# Altium PCB plp-cd_2a_assm.PcbDoc
Units mm, origin at the board's own origin, x right, y up, seen from the top; angles counter-clockwise.
Board outline 34 x 22 mm, 4 copper layers (Top Layer, Signal Layer 1, Signal Layer 2, Bottom Layer), stack 1.026 mm thick; 38 components, 36 nets, 155 pads, 46 vias.
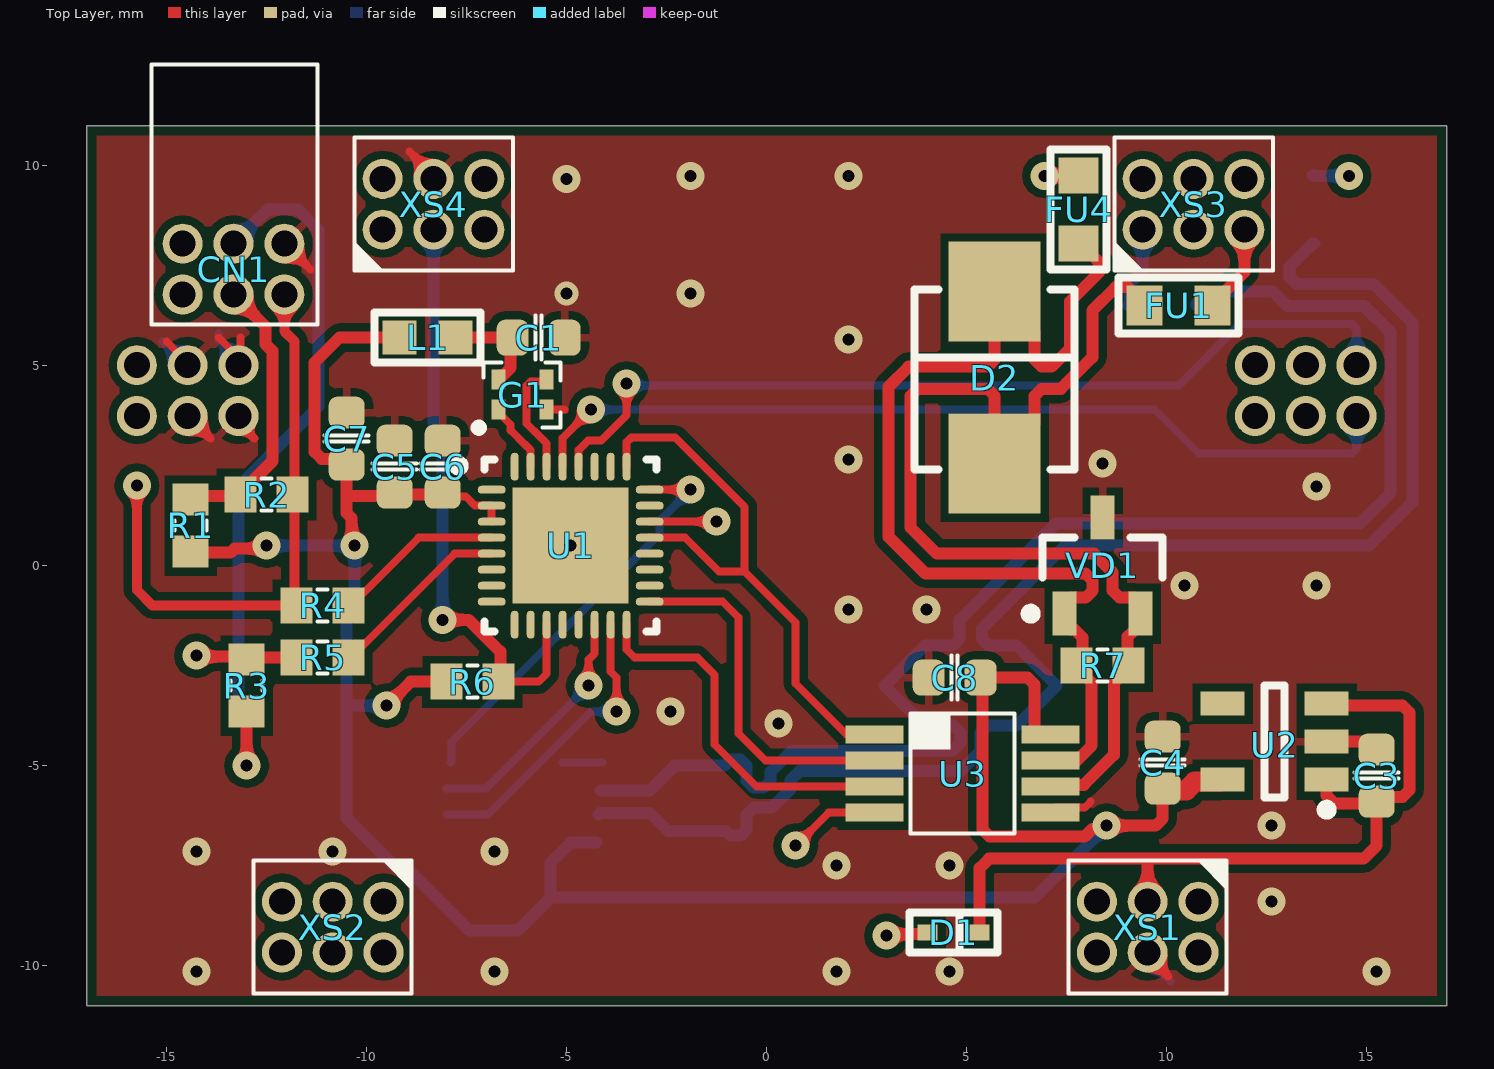
[diagram p0: Top Layer view]
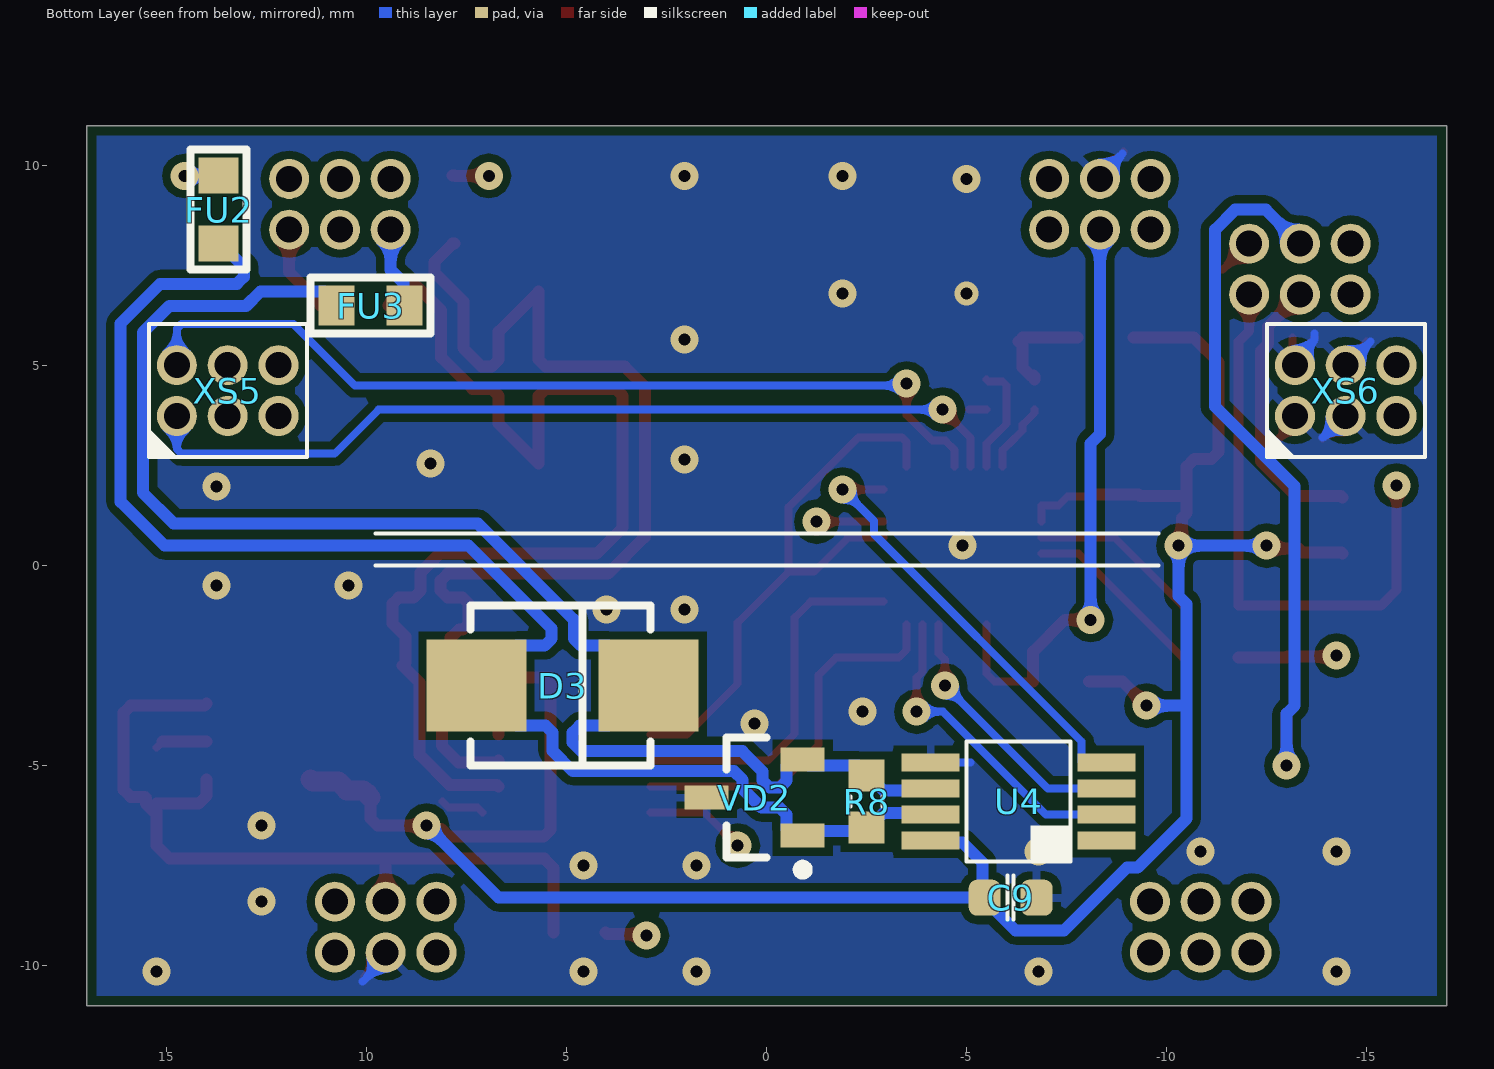
[diagram p1: Bottom Layer view, seen from below]
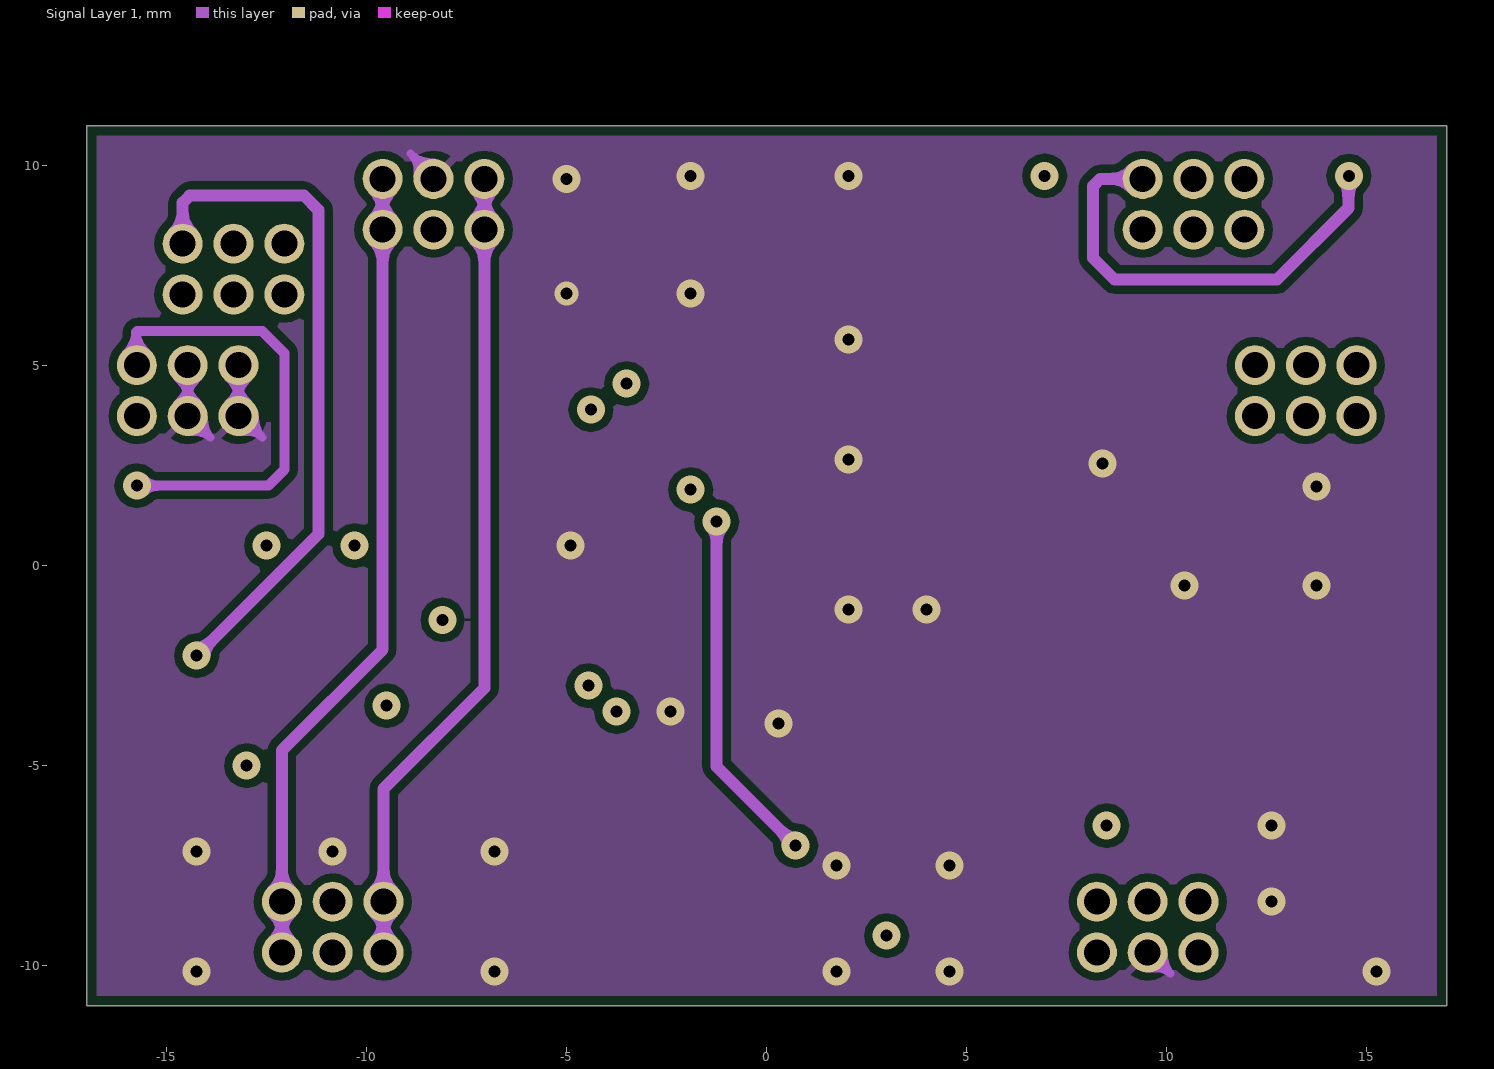
[diagram p2: Signal Layer 1]
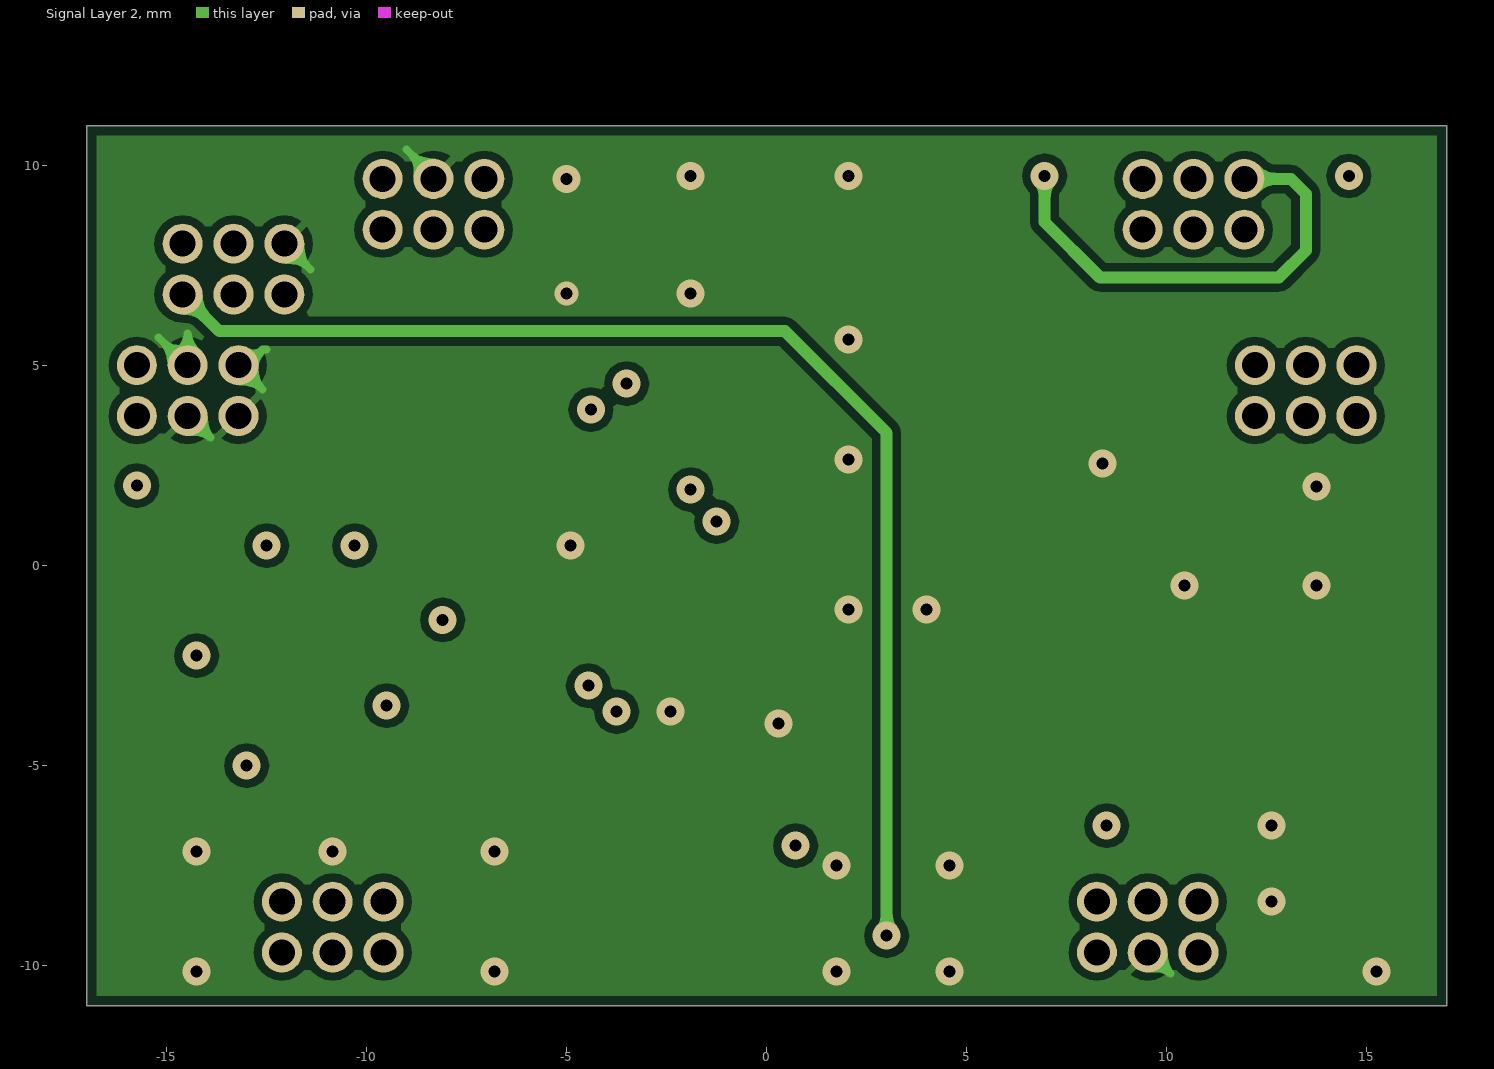
[diagram p3: Signal Layer 2]
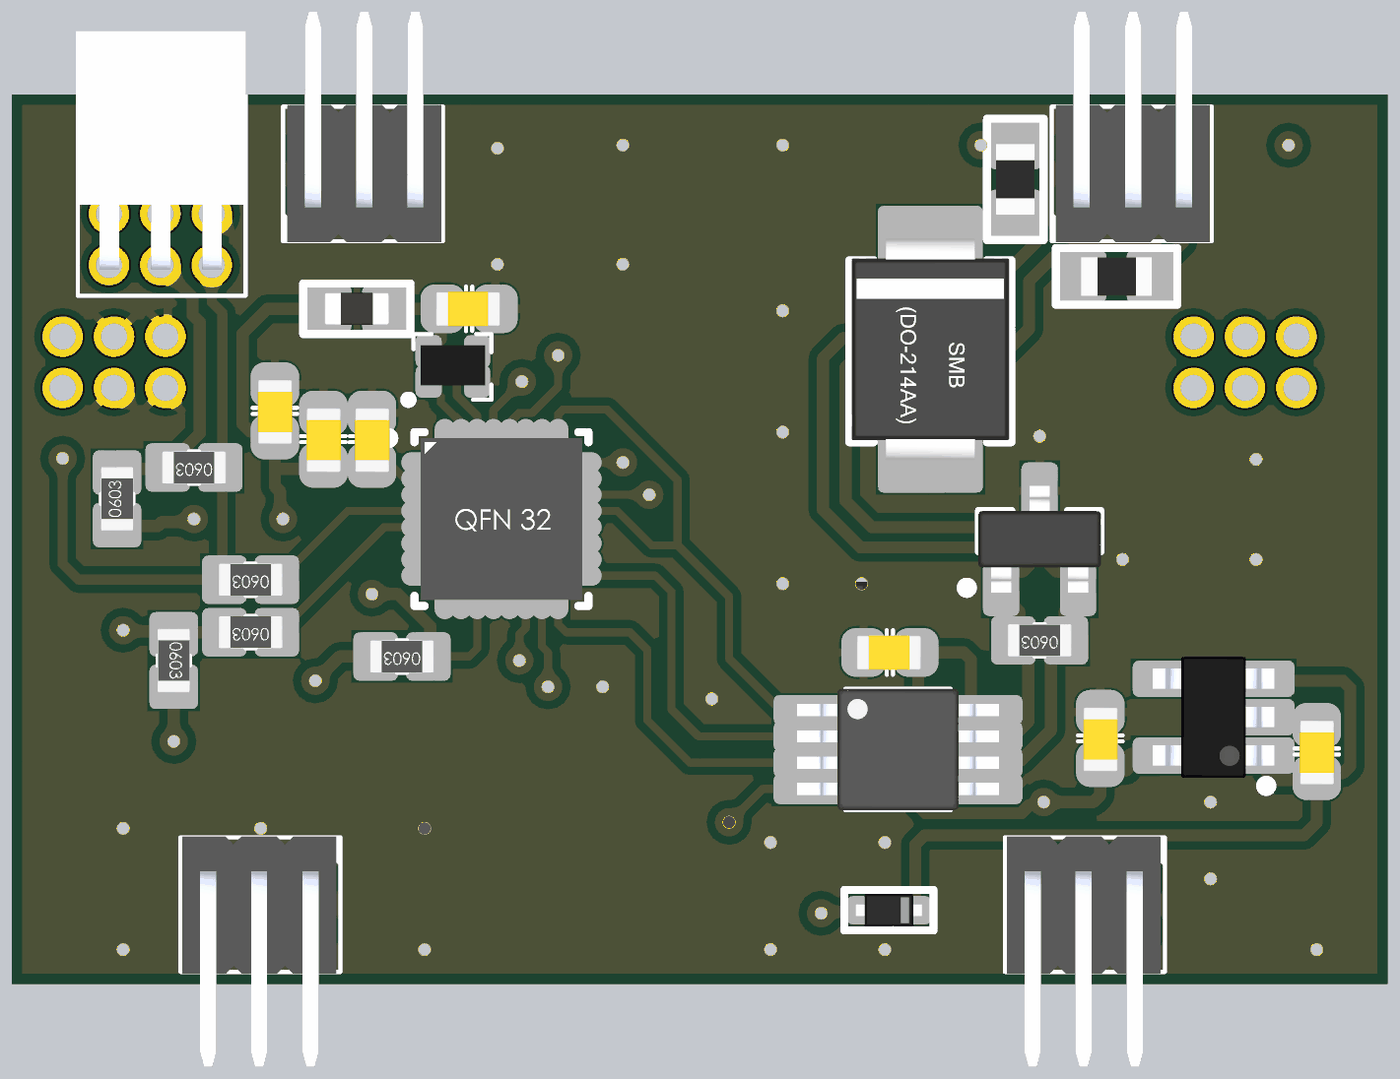
[diagram p4: 3D render of the assembled board from above, using the file's embedded part models]
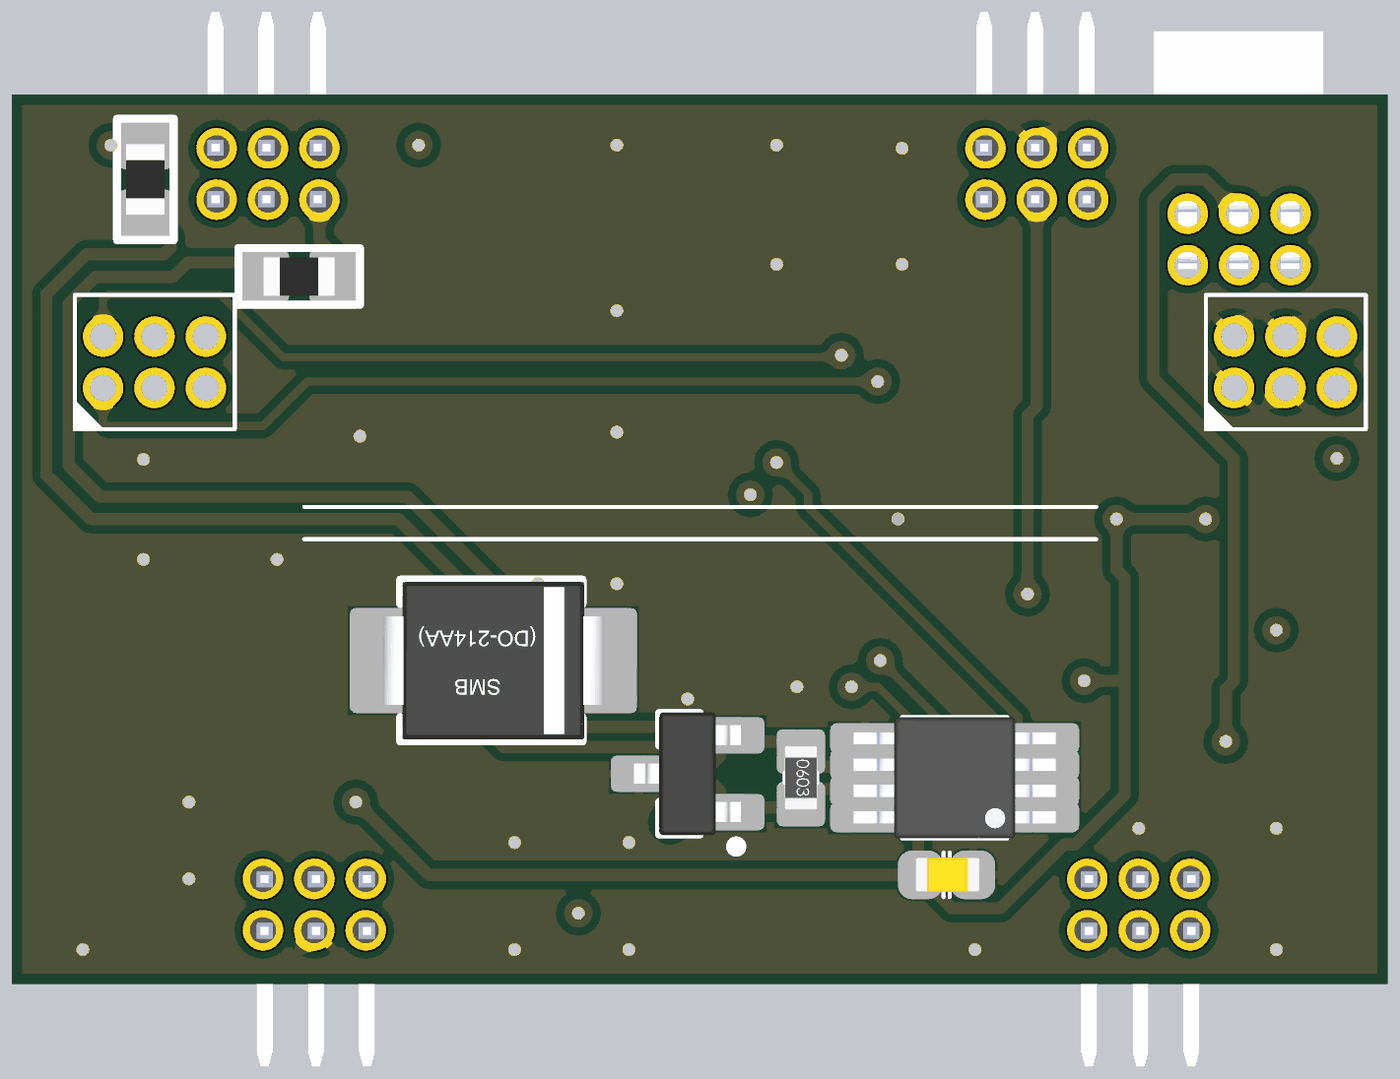
[diagram p5: 3D render of the assembled board from below, using the file's embedded part models]

## Layer stack, top to bottom
Top Solder: solder mask 0.0102, SM-001, Dk 3.5
Top Layer: signal copper 0.035
Dielectric 2: core 0.3, FR4, Dk 4.6
Signal Layer 1: signal copper 0.018
Dielectric 1: prepreg 0.32, FR4 HiTg170, Dk 4.7
Signal Layer 2: signal copper 0.018
Dielectric 3: core 0.3, FR4, Dk 4.6
Bottom Layer: signal copper 0.035
Bottom Solder: solder mask 0.0102, SM-001, Dk 3.5

## Board outline
-17,-9 -17,11 17,11 17,-11 -17,-11

## Design rules (kind name [scope] priority, off if disabled: settings)
AcuteAngle [All] p1: minimum=3.50000000000000E+0001 checktracksonly=FALSE
BoardOutlineClearance "BoardOutlineClearance 1" [All] p1: gap=0.25 ignorepadtopadclearanceinfootprint=FALSE // Milling
BoardOutlineClearance "BoardOutlineClearance 2" [All] p2 off: gap=0.4 ignorepadtopadclearanceinfootprint=FALSE except(0: Arc-SplitContinuation Track-SplitContinuation SMDPad-SplitContinuation THPad-SplitContinuation Via-SplitContinuation Fill-SplitContinuation Poly-SplitContinuation Region-SplitContinuation Text-SplitContinuation) // V-Cut
Clearance "Clearance-1 1 Oz" [All] p1: gap=0.2 ignorepadtopadclearanceinfootprint=TRUE except(0.25: Arc-Hole Track-Hole SMDPad-Hole THPad-Hole Via-Hole Fill-Hole Poly-Hole Region-Hole Text-Hole) // Standart
Clearance "Clearance-1 1/2 Oz" [All] p2 off: gap=0.125 ignorepadtopadclearanceinfootprint=FALSE except(0.2: Arc-Fill Arc-Poly Track-Fill Track-Poly SMDPad-SMDPad SMDPad-Fill SMDPad-Poly THPad-Fill THPad-Poly Via-Fill Via-Poly Fill-Fill Fill-Poly Poly-Poly Poly-Region Poly-Text; 0.25: Arc-Hole Track-Hole SMDPad-Hole THPad-Hole Via-Hole Fill-Hole Poly-Hole Region-Hole Text-Hole) // Standart
Clearance "Clearance-2 1/2 Oz" [All] p3 off: gap=0.1 ignorepadtopadclearanceinfootprint=FALSE except(0.15: Arc-Fill Arc-Poly Track-Fill Track-Poly SMDPad-SMDPad SMDPad-Fill SMDPad-Poly THPad-Fill THPad-Poly Via-Fill Via-Poly Fill-Fill Fill-Poly Poly-Poly Poly-Region Poly-Text; 0.25: Arc-Hole Track-Hole SMDPad-Hole THPad-Hole Via-Hole Fill-Hole Poly-Hole Region-Hole Text-Hole) // Advance
Clearance "Clearance 2 Oz" [All] p4 off: gap=0.3 ignorepadtopadclearanceinfootprint=FALSE except(0.25: Arc-Hole Track-Hole SMDPad-Hole THPad-Hole Via-Hole Fill-Hole Poly-Hole Region-Hole Text-Hole)
Clearance "Clearance-2 1 Oz" [All] p5 off: gap=0.15 ignorepadtopadclearanceinfootprint=FALSE except(0.2: Arc-Fill Arc-Poly Track-Fill Track-Poly SMDPad-Fill SMDPad-Poly THPad-Fill THPad-Poly Via-Fill Via-Poly Fill-Fill Fill-Poly Poly-Poly; 0.25: Arc-Hole Track-Hole SMDPad-Hole THPad-Hole Via-Hole Fill-Hole Poly-Hole Region-Hole Text-Hole) // Advance
Clearance "Clearance 3 Oz" [All] p6 off: gap=0.35 ignorepadtopadclearanceinfootprint=FALSE except(0.25: Arc-Hole Track-Hole SMDPad-Hole THPad-Hole Via-Hole Fill-Hole Poly-Hole Region-Hole Text-Hole)
DiffPairsRouting "DiffPairsRouting 1 Oz" [All] p1: maxlimit=0.254 minlimit=0.2 mostfreqgap=0.254 toplayer_minwidth=0.2 toplayer_maxwidth=0.381 toplayer_prefwidth=0.381 midlayer1_minwidth=0.2 midlayer1_maxwidth=0.381 midlayer1_prefwidth=0.381 midlayer2_minwidth=0.2 midlayer2_maxwidth=0.381 midlayer2_prefwidth=0.381 bottomlayer_minwidth=0.2 bottomlayer_maxwidth=0.381 bottomlayer_prefwidth=0.381 maxuncoupledlength=12.7
DiffPairsRouting "DiffPairsRouting 1/2 Oz" [All] p2 off: maxlimit=0.254 minlimit=0.1 mostfreqgap=0.254 toplayer_minwidth=0.1 toplayer_maxwidth=0.381 toplayer_prefwidth=0.381 midlayer1_minwidth=0.1 midlayer1_maxwidth=0.381 midlayer1_prefwidth=0.381 midlayer2_minwidth=0.1 midlayer2_maxwidth=0.381 midlayer2_prefwidth=0.381 bottomlayer_minwidth=0.1 bottomlayer_maxwidth=0.381 bottomlayer_prefwidth=0.381 maxuncoupledlength=12.7
HoleSize "Minimum HoleSize" [IsPad] p1: absolutevalues=TRUE maxlimit=5.9 minlimit=0.6 maxpercent=80.000 minpercent=20.000
HoleSize "Minimum HoleSize VIA 1" [IsVia] p2: absolutevalues=TRUE maxlimit=5.9 minlimit=0.3 maxpercent=80.000 minpercent=20.000 // Standart
HoleSize "Minimum HoleSize VIA 2" [IsVia] p3 off: absolutevalues=TRUE maxlimit=5.9 minlimit=0.2 maxpercent=80.000 minpercent=20.000 // Advance
HoleToHoleClearance Hole2HoleClearance [All] p1: gap=0.25 allowstackedmicrovias=FALSE
MinimumAnnularRing "Minimum AR VIA Standart" [IsVia] p1: minimumring=0.15
MinimumAnnularRing "Minimum AR PAD Standart" [IsPAD] p2: minimumring=0.2
MinimumAnnularRing "Minimum AR VIA Advance" [IsVia] p3: minimumring=0.1
MinimumAnnularRing "Minimum AR PAD Advance" [IsPAD] p4: minimumring=0.15
MinimumSolderMaskSliver "SolderMask Bridge Standart" [All] p1: minsoldermaskwidth=0.15 // All Masks
MinimumSolderMaskSliver "SolderMask Bridge Advance" [All] p2 off: minsoldermaskwidth=0.1 // Mask LDI
PasteMaskExpansion [All] p1: expansion=0.15
PlaneClearance "PlaneClearance 3 Oz" [All] p1 off: clearance=0.35
PlaneClearance "PlaneClearance 2 Oz" [All] p2 off: clearance=0.3
PlaneClearance "PlaneClearance 1 Oz" [All] p3: clearance=0.2
PlaneClearance "PlaneClearance-1 1/2 Oz" [All] p4 off: clearance=0.2 // Standart
PlaneClearance "PlaneClearance-2 1/2 Oz" [All] p5 off: clearance=0.15 // Advance
PlaneConnect "TermalConnect 3 Oz" [All] p1 off: planeconnectstyle=Relief reliefexpansion=0.2 reliefentries=4 reliefconductorwidth=0.35 reliefairgap=0.35 // Standart
PlaneConnect "TermalConnect 2 Oz" [All] p2 off: planeconnectstyle=Relief reliefexpansion=0.2 reliefentries=4 reliefconductorwidth=0.3 reliefairgap=0.3 // Standart
PlaneConnect "TermalConnect-1 1 Oz" [All] p3: planeconnectstyle=Relief reliefexpansion=0.2 reliefentries=2 reliefconductorwidth=0.2 reliefairgap=0.2 // Standart
PlaneConnect "TermalConnect-2 1 Oz" [All] p4 off: pad.planeconnectstyle=Relief pad.reliefexpansion=0.15 pad.reliefentries=4 pad.reliefconductorwidth=0.2 pad.reliefairgap=0.2 via.planeconnectstyle=Direct via.reliefexpansion=0.15 via.reliefentries=4 via.reliefconductorwidth=0.15 via.reliefairgap=0.15 // Advance
PlaneConnect "TermalConnect-1 1/2 Oz" [All] p5 off: planeconnectstyle=Relief reliefexpansion=0.2 reliefentries=4 reliefconductorwidth=0.2 reliefairgap=0.2 // Standart
PlaneConnect "TermalConnect-2 1/2 Oz" [All] p6 off: pad.planeconnectstyle=Relief pad.reliefexpansion=0.15 pad.reliefentries=4 pad.reliefconductorwidth=0.15 pad.reliefairgap=0.15 via.planeconnectstyle=Direct via.reliefexpansion=0.15 via.reliefentries=4 via.reliefconductorwidth=0.15 via.reliefairgap=0.15 // Advance
PolygonConnect "PolygonConnect 3 Oz" [All] p1 off: thpad.connectstyle=Relief thpad.reliefconductorwidth=0.35 thpad.reliefentries=4 thpad.polygonreliefangle="90 Angle" thpad.airgapwidth=0.35 smdpad.connectstyle=Relief smdpad.reliefconductorwidth=0.35 smdpad.reliefentries=4 smdpad.polygonreliefangle="90 Angle" smdpad.airgapwidth=0.35 via.connectstyle=Direct via.reliefconductorwidth=0.254 via.reliefentries=4 via.polygonreliefangle="90 Angle" via.airgapwidth=0.254
PolygonConnect "PolygonConnect 2 Oz" [All] p2 off: thpad.connectstyle=Relief thpad.reliefconductorwidth=0.3 thpad.reliefentries=4 thpad.polygonreliefangle="90 Angle" thpad.airgapwidth=0.3 smdpad.connectstyle=Relief smdpad.reliefconductorwidth=0.3 smdpad.reliefentries=4 smdpad.polygonreliefangle="90 Angle" smdpad.airgapwidth=0.3 via.connectstyle=Direct via.reliefconductorwidth=0.254 via.reliefentries=4 via.polygonreliefangle="90 Angle" via.airgapwidth=0.254
PolygonConnect "PolygonConnect-1 1 Oz" [All] p3: thpad.connectstyle=Relief thpad.reliefconductorwidth=0.2 thpad.reliefentries=2 thpad.polygonreliefangle="135 Angle" thpad.airgapwidth=0.2 smdpad.connectstyle=Relief smdpad.reliefconductorwidth=0.2 smdpad.reliefentries=4 smdpad.polygonreliefangle="90 Angle" smdpad.airgapwidth=0.2 via.connectstyle=Direct via.reliefconductorwidth=0.254 via.reliefentries=4 via.polygonreliefangle="90 Angle" via.airgapwidth=0.254 // Standart
PolygonConnect "PolygonConnect-2 1 Oz" [All] p4 off: thpad.connectstyle=Relief thpad.reliefconductorwidth=0.15 thpad.reliefentries=4 thpad.polygonreliefangle="90 Angle" thpad.airgapwidth=0.15 smdpad.connectstyle=Relief smdpad.reliefconductorwidth=0.15 smdpad.reliefentries=4 smdpad.polygonreliefangle="90 Angle" smdpad.airgapwidth=0.15 via.connectstyle=Direct via.reliefconductorwidth=0.254 via.reliefentries=4 via.polygonreliefangle="90 Angle" via.airgapwidth=0.254 // Advance
PolygonConnect "PolygonConnect-1 1/2 Oz" [All] p5 off: thpad.connectstyle=Relief thpad.reliefconductorwidth=0.15 thpad.reliefentries=4 thpad.polygonreliefangle="90 Angle" thpad.airgapwidth=0.2 smdpad.connectstyle=Relief smdpad.reliefconductorwidth=0.2 smdpad.reliefentries=4 smdpad.polygonreliefangle="90 Angle" smdpad.airgapwidth=0.2 via.connectstyle=Direct via.reliefconductorwidth=0.254 via.reliefentries=4 via.polygonreliefangle="90 Angle" via.airgapwidth=0.254 // Standart
PolygonConnect "PolygonConnect-2 1/2 Oz" [All] p6 off: thpad.connectstyle=Relief thpad.reliefconductorwidth=0.125 thpad.reliefentries=4 thpad.polygonreliefangle="90 Angle" thpad.airgapwidth=0.15 smdpad.connectstyle=Relief smdpad.reliefconductorwidth=0.125 smdpad.reliefentries=4 smdpad.polygonreliefangle="90 Angle" smdpad.airgapwidth=0.15 via.connectstyle=Direct via.reliefconductorwidth=0.254 via.reliefentries=4 via.polygonreliefangle="90 Angle" via.airgapwidth=0.254 // Advance
RoutingCorners [All] p1 off: cornerstyle=45-Degree minsetback=2.54 maxsetback=2.54
RoutingVias [All] p1: holewidth=0.3 width=0.7 viastyle="Through Hole" minholewidth=0.2 minwidth=0.4 maxholewidth=5.9 maxwidth=6.4
ShortCircuit [All] p1: allowed=TRUE
SilkToSilkClearance Silk2SilkClearance [All] p1: silktosilkclearance=0.15
SilkToSolderMaskClearance Silk2SolderMaskClearance [All] p1: minsilkscreentomaskgap=0.15 clearancetoexposedcopper=FALSE
SolderMaskExpansion SolderMaskExpansion-1 [All] p1: expansion=0.05 istentingtop=FALSE // Standart
SolderMaskExpansion "SolderMaskExpansion LDI" [All] p2: expansion=0.025 istentingtop=FALSE // Advance
UnRoutedNet [All] p1: checkbadconnections=TRUE
Width "Width 1 Oz" [All] p1: maxlimit=10 minlimit=0.15 preferedwidth=0.2 checkconnectedcopper=TRUE
Width "Width 3 Oz" [All] p2 off: maxlimit=10 minlimit=0.35 preferedwidth=0.4 checkconnectedcopper=TRUE
Width "Width 2 Oz" [All] p3 off: maxlimit=10 minlimit=0.3 preferedwidth=0.35 minimp=50.000000 maximp=50.000000 favimp=50.000000 checkconnectedcopper=TRUE
Width "Width 1/2 Oz" [All] p4 off: maxlimit=10 minlimit=0.1 preferedwidth=0.125 checkconnectedcopper=TRUE
18 further rules are at their usual default settings.

## Classes and differential pairs
differential pair SSI_OUT: +SSI_OUT_P -SSI_OUT_N
differential pair 485/SSI: +485/SSI_P -485/SSI_N

## Components (designator, comment, footprint, x,y, rotation, side; value= is the part's Value field where it differs from the comment)
C1 "Ceramic capacitor, 0.1μF, X7R, ±10%, 16V, 0603, -55...+125°C" "CAP: 0603" -5.7,5.7 r180 top value=0.1μF
C3 "Ceramic capacitor, 1μF, X7R, ±10%, 16V, 0603, -55...+125°C" "CAP: 0603" 15.25,-5.25 r270 top value=1μF
C4 "Ceramic capacitor, 1μF, X7R, ±10%, 16V, 0603, -55...+125°C" "CAP: 0603" 9.9,-4.925 r270 top value=1μF
C5 "Ceramic capacitor, 4.7μF, X7R, ±10%, 16V, 0603, -55...+125°C" "CAP: 0603" -9.3,2.475 r270 top value=4.7μF
C6 "Ceramic capacitor, 0.1μF, X7R, ±10%, 16V, 0603, -55...+125°C" "CAP: 0603" -8.1,2.475 r270 top value=0.1μF
C7 "Ceramic capacitor, 4.7μF, X7R, ±10%, 16V, 0603, -55...+125°C" "CAP: 0603" -10.5,3.175 r270 top value=4.7μF
C8 "Ceramic capacitor, 0.1μF, X7R, ±10%, 16V, 0603, -55...+125°C" "CAP: 0603" 4.7,-2.8 r180 top value=0.1μF
C9 "Ceramic capacitor, 0.1μF, X7R, ±10%, 16V, 0603, -55...+125°C" "CAP: 0603" -6.1,-8.3 r180 bottom value=0.1μF
CN1 "PBD 1.27-6R" "CON: PLLD-6R(1.27)" -14.6,6.775 r0 top locked
D1 "Schottky diode, 80V, 500mA, 1V, 15pF, SOD-123, -55...+150°C" "DIODE: SOD523" 4.025,-9.175 r0 top
D2 "SMBJ10CA-TR" "DIODE: SMB" 5.7,4.7 r90 top
D3 "SMBJ10CA-TR" "DIODE: SMB" 5.1,-3 r180 bottom
FU1 "0zcm0002ff2g" "FUSE: 0603" 10.3,6.5 r180 top
FU2 "0zcm0002ff2g" "FUSE: 0603" 13.7,8.9 r90 bottom
FU3 "0zcm0002ff2g" "FUSE: 0603" 9.9,6.5 r180 bottom
FU4 "0zcm0002ff2g" "FUSE: 0603" 7.8,8.9 r270 top
G1 "AMPMGFB-48.0000T" AMPMGFB(1.6x1.2) -6.7,3.9 r0 top
L1 "BLM18AG102SN1D" "IND: 0603" -8.475,5.7 r0 top
R1 "Resistor film, 10K, ±5%, 0603, 0.1W, -55...+125°C" "RES: 0603" -14.4,1 r90 top value=10K
R2 "Resistor film, 1K, ±5%, 0603, 0.1W, -55...+125°C" "RES: 0603" -12.5,1.775 r180 top value=1K
R3 "Resistor film, 1K, ±5%, 0603, 0.1W, -55...+125°C" "RES: 0603" -13,-3 r270 top value=1K
R4 "Resistor film, 100, ±5%, 0603, 0.1W, -55...+125°C" "RES: 0603" -11.1,-1 r180 top value=100
R5 "Resistor film, 100, ±5%, 0603, 0.1W, -55...+125°C" "RES: 0603" -11.1,-2.3 r180 top value=100
R6 "Resistor film, 10K, ±5%, 0603, 0.1W, -55...+125°C" "RES: 0603" -7.359,-2.9 r180 top value=10K
R7 "Resistor film, 120, ±5%, 0603, 0.1W, -55...+125°C" "RES: 0603" 8.4,-2.5 r180 top value=120
R8 "Resistor film, 120, ±5%, 0603, 0.1W, -55...+125°C" "RES: 0603" -2.5,-5.9 r270 bottom value=120
U1 "EFM8BB31F64G-A-QFN32" 32-QFN(4x4) -4.9,0.5 r0 top
U2 "LP5907MFX-3.3" SOT23-5 12.7,-4.4 r180 top
U3 "SN65HVD72DGK" VSSOP-8 4.9,-5.2 r0 top
U4 "SN65HVD72DGK" VSSOP-8 -6.3,-5.9 r0 bottom
VD1 "SM712" SOT23 8.4,0 r90 top
VD2 "SM712" SOT23 0.3,-5.8 r0 bottom
XS1 "2199R05-06G-301523" "CON: PLL-6(2x3R1.27male)" 10.795,-8.4 r180 top locked
XS2 "2199R05-06G-301523" "CON: PLL-6(2x3R1.27male)" -9.58,-8.4 r180 top locked
XS3 "2199R05-06G-301523" "CON: PLL-6(2x3R1.27male)" 9.4,8.4 r0 top locked
XS4 "2199R05-06G-301523" "CON: PLL-6(2x3R1.27male)" -9.6,8.4 r0 top locked
XS5 "2199R05-06G-301523" "CON: PLL-6(2x3R1.27female)" 15.5,2.7 r180 bottom locked
XS6 "2199R05-06G-301523" "CON: PLL-6(2x3R1.27female)" -12.452,2.7 r180 bottom locked

## Footprints (in the part's own frame and the unit in brackets; to place one, negate y for a bottom-side part, rotate by r counter-clockwise, add the part's x,y. Pads: shape width x height; smd on the part's side, far side on the other; paste and mask are expansions set on the pad)
32-QFN(4x4) [mm] "QFN, 32-Leads, Body 4,00x4,00mm, Pitch 0,40mm, Thermal Pad 2,90x2,90mm, IPC Medium Density"
  rect 2.9x2.9 smd: 0(0,0)
  oval 0.7x0.2 smd: 1(-1.975,1.4) 2(-1.975,1) 3(-1.975,0.6) 4(-1.975,0.2) 5(-1.975,-0.2) 6(-1.975,-0.6) 7(-1.975,-1) 8(-1.975,-1.4) 17(1.975,-1.4) 18(1.975,-1) 19(1.975,-0.6) 20(1.975,-0.2) 21(1.975,0.2) 22(1.975,0.6) 23(1.975,1) 24(1.975,1.4)
  oval 0.2x0.7 smd: 9(-1.4,-1.975) 10(-1,-1.975) 11(-0.6,-1.975) 12(-0.2,-1.975) 13(0.2,-1.975) 14(0.6,-1.975) 15(1,-1.975) 16(1.4,-1.975) 25(1.4,1.975) 26(1,1.975) 27(0.6,1.975) 28(0.2,1.975) 29(-0.2,1.975) 30(-0.6,1.975) 31(-1,1.975) 32(-1.4,1.975)
  silkscreen extent -2.92,-2.15 2.15,2.15, body extent -2,-2 2,2, height 0.57
AMPMGFB(1.6x1.2) [mm]
  rect 0.35x0.5 smd: 1(0,0) 2(1.2,0) 3(1.2,0.75) 4(0,0.75)
  silkscreen extent -0.57,-0.8 1.55,1.17, body extent -0.2,-0.1 1.4,0.9, height 0.5
"CAP: 0603" [mm]
  rrect50% 0.8x0.9 smd: 1(-0.65,0) 2(0.65,0)
  silkscreen extent -0.08,-0.55 0.08,0.55, body extent -0.78,-0.43 0.83,0.44, height 0.8
"CON: PLL-6(2x3R1.27female)" [mm]
  round 1 hole 0.65: 1(0.754,1.042) 2(0.754,2.312) 3(2.024,1.042) 4(2.024,2.312) 5(3.294,1.042) 6(3.294,2.312)
  silkscreen extent 0.05,0.02 4.01,3.34
"CON: PLL-6(2x3R1.27male)" [mm]
  round 1 hole 0.65: 1(0,0) 2(0,1.27) 3(1.27,0) 4(1.27,1.27) 5(2.54,0) 6(2.54,1.27)
  silkscreen extent -0.7,-1.02 3.25,2.3, body extent -0.6,-1.05 3.21,4.65, height 4.39
"CON: PLLD-6R(1.27)" [mm]
  round 1 hole 0.65: 1(0,0.005) 2(0,1.275) 3(1.27,0.005) 4(1.27,1.275) 5(2.54,0.005) 6(2.54,1.275)
  silkscreen extent -1.5,-0.75 3.37,5.75, body extent -0.82,-0.1 3.38,5.8, height 3
"DIODE: SMB" [mm]
  rect 2.5x2.3 smd: 1(-2.15,0) 2(2.15,0)
  silkscreen extent -2.3,-2 2.2,2, body extent -2.75,-1.95 2.75,1.95, height 2.45
"DIODE: SOD523" [mm]
  rect 0.5x0.4 smd: 1(0,0) 2(1.3,0)
  silkscreen extent -0.45,-0.5 1.75,0.5, body extent -0.17,-0.4 1.48,0.4, height 0.65
"FUSE: 0603" [mm]
  rect 0.9x1 smd: 1(-0.85,0) 2(0.85,0)
  Top Layer pour cut-out: -0.6,0.5 -0.4,0.7 0.4,0.7 0.6,0.5 0.6,-0.5 0.4,-0.7 -0.4,-0.7 -0.6,-0.5
  silkscreen extent -1.5,-0.7 1.5,0.7, body extent -0.87,-0.47 0.88,0.48, height 0.54
"IND: 0603" [mm]
  rect 0.85x0.85 smd: 1(-0.7,0) 2(0.7,0)
  silkscreen extent -1.33,-0.63 1.33,0.63, body extent -0.8,-0.4 0.8,0.4, height 0.8
"RES: 0603" [mm]
  rect 0.8x0.9 smd: 1(-0.65,0) 2(0.65,0)
  silkscreen extent -0.13,-0.4 0.13,0.4, body extent -0.8,-0.4 0.8,0.4, height 0.44
SOT23 [mm]
  rect 1.1x0.6 smd: 1(-1.2,0.95) 2(-1.2,-0.95) 3(1.2,0)
  silkscreen extent -1.32,-1.5 0.7,1.92, body extent -1.32,-1.52 1.32,1.52, height 1.12
SOT23-5 [mm] "pitch 0.95 mm"
  rect 1.1x0.6 smd: 1(-1.3,0.95) 2(-1.3,0) 3(-1.3,-0.95) 4(1.3,-0.95) 5(1.3,0.95)
  round 0.5 on Mech13: ""(-1.1,1.1)
  silkscreen extent -1.43,-1.4 0.25,1.82, body extent -1.5,-1.5 1.5,1.5, height 1.3
VSSOP-8 [mm]
  rect 1.45x0.45 smd: 1(-2.2,0.975) 2(-2.2,0.325) 3(-2.2,-0.325) 4(-2.2,-0.975) 5(2.2,-0.975) 6(2.2,-0.325) 7(2.2,0.325) 8(2.2,0.975)
  silkscreen extent -1.3,-1.5 1.3,1.5, body extent -2.5,-1.5 2.5,1.5, height 1.1

## Part data
C1 C3 C4 C5 C6 C7 C8 C9: library part Ceramic_0603, Manufacturer=Yageo, Package=0603, PartNumber=CC0603KRX7R7BB104, Temperature=-55...+125°C, Tolerance=±10%, TypeCapacitor="Ceramic capacitor", TypeDielectric=X7R, Voltage=16V, HelpURL=https://www.digikey.com/product-detail/en/yageo/CC0603KRX7R7BB104/311-1088-1-ND/302998
  C1 C6 C8 C9: ValueManufacturerPartNumber="Ceramic capacitor, 0.1μF, X7R, ±10%, 16V, 0603, -55...+125°C"
  C3 C4: ValueManufacturerPartNumber="Ceramic capacitor, 1μF, X7R, ±10%, 16V, 0603, -55...+125°C"
  C5 C7: ValueManufacturerPartNumber="Ceramic capacitor, 4.7μF, X7R, ±10%, 16V, 0603, -55...+125°C"
D1: library part Schottky_single, Current=500mA, Manufacturer="Diodes Incorporated", Package=SOD-123, PartNumber=BAT54XV2, Temperature=-55...+150°C, Voltage=80V, VoltageDrop=1V, HelpURL=https://www.digikey.com/product-detail/en/diodes-incorporated/MBR0580S1-7/MBR0580S1-7DICT-ND/5080371, RecoveryTime=15pF, TypeDiode="Schottky diode", ValueManufacturerPartNumber="Schottky diode, 80V, 500mA, 1V, 15pF, SOD-123, -55...+150°C"
FU1 FU2 FU3 FU4: library part FUSE:0603
L1: "100MHz 1K"
R1 R2 R3 R4 R5 R6 R7 R8: library part Resistor_0603, Manufacturer=Yageo, Package=0603, PartNumber=RC0603JR-07100RL, Power=0.1W, Temperature=-55...+125°C, Tolerance=±5%, TypeResistor="Resistor film", HelpURL=https://www.digikey.com/product-detail/en/yageo/RC0603JR-07100RL/311-100GRCT-ND/729644
  R1 R6: ValueManufacturerPartNumber="Resistor film, 10K, ±5%, 0603, 0.1W, -55...+125°C"
  R2 R3: ValueManufacturerPartNumber="Resistor film, 1K, ±5%, 0603, 0.1W, -55...+125°C"
  R4 R5: ValueManufacturerPartNumber="Resistor film, 100, ±5%, 0603, 0.1W, -55...+125°C"
  R7 R8: ValueManufacturerPartNumber="Resistor film, 120, ±5%, 0603, 0.1W, -55...+125°C"
U1: "8051 MCU Core"
U2: "LDO 250 mA"
U3 U4: "RS-485/422", ComponentLink1Description=Datasheet, ComponentLink1URL=https://www.ti.com/lit/ds/symlink/sn65hvd72.pdf?ts=1607084930164&ref_url=https%253A%252F%252Fwww.ti.com%252Fstore%252Fti%252Fen%252Fp%252Fproduct%252F%253Fp%253DSN65HVD72DRBT
VD1: "EIA RS-485 ±7V ±12V"
VD2: "EIA RS-485 ±7V"
XS1 XS2 XS3 XS4: library part 2199R05-06G-301523Out, "Step 1.27 R"
XS5 XS6: library part 2199R05-06G-301523In, "Step 1.27"

## Via types
v1: diameter 0.7, hole 0.3, Top Layer to Bottom Layer, tented both sides, 43 vias
v2: diameter 0.7, hole 0.3, Top Layer to Bottom Layer, tented bottom, 1 vias
v3: diameter 0.6, hole 0.3, Top Layer to Bottom Layer, tented both sides, 1 vias
v4: diameter 0.7/0.7/0.7/0.7 (per signal layer), hole 0.3, Top Layer to Bottom Layer, tented both sides, 1 vias

## Nets (pads, with @x,y where several pads share a name; then routed paths per layer and width w, separated by ;. In a path a pad name is that pad's centre, name@x,y a point inside that pad or via, vN(x,y) a via of type N, cw(c..) or ccw(c..) an arc to the next point about the centre after c; other vN are vias at no path point)
3.3V: C4.2 C5.2 C6.2 C7.2 C8.1 C9.1 L1.1 R1.1 R6.2 U1.2 U1.3 U2.5 U3.8 U4.8 | length 62.6
  Top Layer w0.2: C6.2@-8.1,1.775 -8.059,1.734 -7.525,1.734 -7.291,1.5 U1.2 U1.3
  Top Layer w0.3: R1.1@-14.4,0.3 -14.375,0.325 -13.4,0.325 -13.3,0.425 -12.575,0.425 v1(-12.5,0.5) ; v1(-10.3,0.5) -10.377,0.577 -10.377,1.19 -10.5,1.313 -10.5,1.737 ; v1(-9.5,-3.5) -8.9,-2.9 R6.2@-8.059,-2.9 ; L1.1 -10.683,5.7 -11.3,5.083 -11.3,2.846 -11.124,2.67 -10.695,2.67 -10.5,2.475 -10.5,1.737 ; C6.2@-8.1,1.775 -9.3,1.775 -9.337,1.737 -10.5,1.737 ; U3.8@6.7,-4.225 6.7,-2.976 6.524,-2.8 5.4,-2.8 5.4,-6.599 5.576,-6.775 7.945,-6.775 8.143,-6.577 8.423,-6.577 v1(8.5,-6.5) 9.724,-6.5 9.9,-6.324 9.9,-5.8 C4.2@9.9,-5.625
  Top Layer w0.5: C4.2@9.9,-5.8 10.076,-5.624 10.5,-5.624 10.5,-5.6 10.7,-5.4 11.35,-5.4 U2.5
  Bottom Layer w0.3: v1(-12.5,0.5) v1(-10.3,0.5) -10.3,-0.759 -10.5,-0.959 -10.5,-3.5 ; v1(-9.5,-3.5) -10.5,-3.5 ; U4.8@-4.25,-6.925 -4.9,-6.925 -5.4,-7.425 C9.1@-5.4,-8.3 ; v1(8.5,-6.5) 6.7,-8.3 C9.1@-5.4,-8.3 ; -10.5,-3.5 -10.5,-6.32 -9.575,-7.245 -9.27,-7.55 -9.005,-7.55 -7.43,-9.125 -6.225,-9.125 C9.1@-5.4,-8.3
5V: C3.2 D1.2 U2.1 U2.3 XS1.3 | length 20.9
  Top Layer w0.3: D1.2 5.325,-7.559 5.559,-7.325 9.521,-7.325 ; XS1.3 9.525,-7.329 9.521,-7.325 ; U2.1 14,-5.75 14.2,-5.95 15.25,-5.95 C3.2@15.25,-6.219 ; U2.3 14.05,-3.5 15.899,-3.5 16.075,-3.676 16.075,-5.604 15.899,-5.78 15.546,-5.78 15.52,-5.806 15.52,-5.949 C3.2@15.25,-6.219 ; 9.521,-7.325 14.925,-7.325 15.25,-7 C3.2@15.25,-6.219
485/SCKA: FU1.1 XS3.5 | length 2.2
  Top Layer w0.3: FU1.1 11.15,6.55 11.94,7.34 XS3.5
485/SCKB: FU4.1 XS3.6 | length 12.6
  Top Layer w0.3: v1(6.949,9.748) 7.798,9.748 FU4.1 FU4.1@7.85,9.75
  Signal Layer 2 w0.3: v1(6.949,9.748) 6.949,8.589 8.333,7.205 12.805,7.205 13.476,7.876 13.476,9.296 13.102,9.67 XS3.6
485/SSI_N: D2.2 FU4.2 R7.2 U3.7 VD1.1 | length 27.1
  Top Layer w0.3: U3.7@6.7,-4.875 6.748,-4.923 7.7,-4.923 8.123,-4.5 8.123,-2.923 7.7,-2.5 7.899,-2.301 7.899,-1.801 7.699,-1.6 7.6,-1.6 7.45,-1.45 7.45,-0.95 7.6,-0.8 7.974,-0.8 8.15,-0.624 8.15,-0.376 7.974,-0.2 3.97,-0.2 3.046,0.724 3.046,4.477 3.546,4.977 5.524,4.977 5.7,5.153 D2.2 6.7,5.85 6.7,5.153 6.876,4.977 7.124,4.977 7.585,5.438 7.585,6.609 8.302,7.326 8.302,7.598 7.85,8.05 FU4.2
485/SSI_P: D2.1 FU1.2 R7.1 U3.6 VD1.2 | length 27.4
  Top Layer w0.3: U3.6@6.7,-5.525 6.748,-5.477 7.929,-5.477 8.677,-4.729 8.677,-2.923 9.1,-2.5 9.024,-2.424 9.024,-1.776 9.2,-1.6 9.35,-1.45 9.35,-0.95 9.2,-0.8 8.826,-0.8 8.65,-0.624 8.65,-0.169 8.181,0.3 4.253,0.3 3.6,0.953 3.6,4.247 3.776,4.423 5.524,4.423 5.7,4.247 D2.1 6.7,3.55 6.7,4.247 6.876,4.423 7.354,4.423 8.139,5.209 8.139,6.379 8.726,6.966 9.034,6.966 9.406,6.594 9.406,6.544 FU1.2
+15: XS1.2
+Uп: XS2.5 XS2.6 XS4.1 XS4.2 | length 20.4
  Signal Layer 1 w0.3: XS2.6 XS2.5 -12.12,-4.62 -9.6,-2.1 XS4.1 XS4.2
-15: XS1.6
-Uп: XS2.1 XS2.2 XS4.5 XS4.6 | length 20.4
  Signal Layer 1 w0.3: XS2.2 XS2.1 -9.58,-5.58 -7.06,-3.06 XS4.5 XS4.6
C2CK: CN1.5 R2.1 R4.2 XS6.6 | length 26.1
  Top Layer w0.25: v1(-15.746,2) -15.746,-0.608 -15.354,-1 -11.8,-1 -11.8,1.775 -11.8,5.602 -12.06,5.862 CN1.5
  Signal Layer 1 w0.25: v1(-15.746,2) -12.46,2 -12.06,2.4 -12.06,5.313 -12.609,5.862 -15.74,5.862 -15.765,5.837 -15.765,5.031 XS6.6
C2D: CN1.2 R3.1 R5.2 | length 19.5
  Top Layer w0.3: v4(-14.25,-2.25) -14.225,-2.275 -13.025,-2.275 -13,-2.3 R5.2@-11.8,-2.3
  Signal Layer 1 w0.3: CN1.2 -14.6,9.074 -14.424,9.25 -11.566,9.25 -11.21,8.894 -11.21,0.79 v4(-14.25,-2.25)
C2Dsns: CN1.4 R3.2 | length 18.3
  Top Layer w0.3: v1(-13,-5) R3.2@-13,-3.7
  Bottom Layer w0.3: CN1.4 -12.48,8.9 -11.708,8.9 -11.21,8.402 -11.21,3.977 -13.2,1.987 -13.2,-3.5 -13,-3.7 v1(-13,-5)
DE1: U1.16 U3.3 | length 9.5
  Top Layer w0.2: U1.16 -3.5,-2.1 -3.3,-2.3 -2.341,-2.3 -1.731,-2.3 -1.3,-2.731 -1.3,-4.475 -0.25,-5.525 U3.3@2.9,-5.525
DE2: U1.14 U4.3 | length 6.2
  Top Layer w0.2: v1(-4.459,-3) -4.459,-2.959 -4.455,-2.955 -4.455,-2.35 -4.3,-2.195 -4.3,-1.769 U1.14
  Bottom Layer w0.2: U4.3@-8,-5.575 -7.034,-5.575 v1(-4.459,-3)
EXTCLK: G1.3 U1.30 | length 2.8
  Top Layer w0.2: U1.30 -5.5,3.056 -5.794,3.35 -5.799,3.35 -6,3.551 -6,4.5 -5.9,4.6 -5.55,4.6 G1.3
EXTOn: G1.1 U1.31 | length 1.7
  Top Layer w0.2: G1.1 -6.7,3.825 -6.4,3.525 -6.4,3.385 -6.06,3.045 ; -6.039,3.03 -5.9,2.891 U1.31
GND: C1.1 C3.1 C4.1 C5.1 C6.1 C7.1 C8.2 C9.2 CN1.6 G1.2 U1.0 U2.2 U3.5 U4.5 VD1.3 VD2.3 XS1.4 XS4.4 XS6.1 XS6.2 XS6.3 XS6.4 | length 27.9
  Top Layer w0.2: -15,5.6 -14.476,5.076 XS6.4 ; XS6.3 -14.467,3.742 -13.9,3.175 ; -13.7,5.7 -13.206,5.206 XS6.2 -13.15,5.068 -13.15,5.7 ; XS6.1 -13.206,3.575 -12.806,3.175 ; CN1.6 -12.05,8.05 -11.4,7.4 ; -8.925,10.35 -8.33,9.755 XS4.4 ; G1.2 -5.062,3.9 -5.055,3.907 ; U3.5 7.225,-6.05 7.95,-6.05 8.1,-5.9 ; XS1.4 9.525,-9.75 10.05,-10.275 ; C3.1@15.1,-4.4 C3.1@15.25,-4.55
  Top Layer w0.3: U2.2 C3.1@15.1,-4.4
  Signal Layer 1 w0.2: XS6.4 XS6.3 -14.442,3.742 -13.9,3.2 ; XS6.2 XS6.1 -13.142,3.742 -12.6,3.2 ; -8.9,10.3 -8.33,9.73 XS4.4 ; XS1.4 9.57,-9.67 10.1,-10.2
  Signal Layer 2 w0.2: -15.2,5.7 -14.512,5.012 XS6.4 -14.476,5.8 ; XS6.3 -14.442,3.742 -13.9,3.2 ; -12.6,4.4 -13.206,5.006 XS6.2 -12.989,5.012 -12.602,5.4 -12.5,5.4 ; CN1.6 -12.05,8.05 -11.4,7.4 ; -9,10.4 -8.33,9.73 XS4.4 ; XS1.4 9.57,-9.67 10.1,-10.2
  Bottom Layer w0.2: -15.1,5.6 -14.512,5.012 XS6.4 ; XS6.3 -14.442,3.742 -13.9,3.2 ; -13.7,5.8 -13.7,5.649 -13.206,5.155 XS6.2 ; -8.9,10.3 -8.33,9.73 XS4.4 ; -5.1,-4.925 U4.5 ; XS1.4 9.525,-9.825 10.1,-10.4
  other v1: -14.25,-10.15 -6.8,-10.15 1.75,-10.15 4.575,-10.15 15.25,-10.15 12.625,-8.4 1.75,-7.5 4.575,-7.5 -14.25,-7.15 -10.85,-7.15 -6.8,-7.15 12.625,-6.5 0.3,-3.95 -2.4,-3.65 2.05,-1.1 4,-1.1 10.45,-0.5 13.75,-0.5 13.75,1.975 8.4,2.55 2.05,2.65 2.05,5.65 -1.9,6.8 -5,9.67 -1.9,9.748 2.05,9.748
  other v2: -4.9,0.5
  other v3: -5,6.8
MOSI_MCU2: U1.23
NetC1_2: C1.2 G1.4 L1.2 | length 2.7
  Top Layer w0.3: L1.2 C1.2@-6.4,5.7 ; G1.4 -6.7,4.725 -6.675,4.75 -6.6,4.75 -6.4,4.95 C1.2@-6.4,5.7 ; C1.2@-6.3,5.6 C1.2@-6.4,5.7
NetCN1_1: CN1.1 D1.1 | length 32.7
  Top Layer w0.3: v1(3,-9.25) 3.037,-9.212 3.988,-9.212 D1.1
  Signal Layer 2 w0.3: CN1.1 -13.682,5.862 0.458,5.862 3,3.32 v1(3,-9.25)
NetR4_1: R4.1 U1.4 | length 4.2
  Top Layer w0.2: R4.1@-10.4,-1 -8.7,0.7 U1.4
NetR5_1: R5.1 U1.5 | length 4.6
  Top Layer w0.2: R5.1@-10.4,-2.3 -7.8,0.3 U1.5
P2.6: R6.1 U1.11 XS4.3 | length 14.8
  Top Layer w0.2: R6.1@-6.659,-2.9 -5.7,-2.9 -5.5,-2.7 U1.11
  Top Layer w0.3: v1(-8.1,-1.355) -7.454,-1.355 -6.659,-2.15 R6.1@-6.659,-2.9
  Bottom Layer w0.3: XS4.3 -8.33,3.289 -8.1,3.059 v1(-8.1,-1.355)
RE1: U1.17 U3.2 | length 9.2
  Top Layer w0.2: U1.17 -1.1,-0.9 -0.7,-1.3 -0.7,-4.2 -0.025,-4.875 U3.2@2.9,-4.875
RE2: U1.15 U4.2 | length 7.6
  Top Layer w0.2: U1.15 -3.9,-1.934 -3.9,-2.65 -3.75,-2.8 v1(-3.75,-3.65)
  Bottom Layer w0.2: U4.2@-8,-6.225 -6.98,-6.225 -4.405,-3.65 v1(-3.75,-3.65)
RST: CN1.3 R1.2 R2.2 | length 7
  Top Layer w0.3: R1.2@-14.4,1.7 -14.363,1.737 -13.238,1.737 -12.356,2.619 -12.356,5.364 -12.535,5.544 -12.535,5.985 CN1.3
"SSI OUT A": FU3.2 XS3.1 | length 2
  Bottom Layer w0.3: FU3.2 9.086,6.536 9.086,7.08 9.4,7.394 XS3.1
"SSI OUT B": FU2.2 XS3.2 | length 12.4
  Signal Layer 1 w0.3: XS3.2 8.338,9.67 8.162,9.494 8.162,7.688 8.691,7.159 12.759,7.159 14.544,8.944 14.544,9.736 v1(14.553,9.744)
  Bottom Layer w0.3: XS3.2 XS3.2@9.534,9.804 ; FU2.2@13.65,9.75 FU2.2 13.706,9.744 v1(14.553,9.744)
SSI_MISO: U1.24 U4.4 | length 10.3
  Top Layer w0.2: U1.24 v1(-1.9,1.9)
  Bottom Layer w0.2: U4.4@-7.9,-4.925 -7.875,-4.9 -7.875,-4.4 -2.679,0.796 -2.679,1.121 v1(-1.9,1.9)
SSI_OUT_N: D3.1 FU2.1 R8.2 U4.7 VD2.1 | length 37.7
  Bottom Layer w0.3: U4.7@-4.2,-6.225 -4.152,-6.177 -2.923,-6.177 -2.463,-6.637 -1.013,-6.637 VD2.1 -0.65,-6.75 -0.5,-6.6 -0.5,-6.226 -0.324,-6.05 0.131,-6.05 0.6,-5.581 0.6,-5.355 0.819,-5.136 4.845,-5.136 5.35,-4.631 5.35,-4.176 5.526,-4 6.25,-4 D3.1 6.25,-2 5.553,-2 5.377,-1.824 5.377,-1.576 7.453,0.5 15.054,0.5 16.15,1.597 16.15,6.059 15.162,7.047 13.247,7.047 13.071,7.223 13.071,7.471 13.65,8.05 FU2.1
SSI_OUT_P: D3.2 FU3.1 R8.1 U4.6 VD2.2 | length 37.4
  Bottom Layer w0.3: U4.6@-4.152,-5.623 -2.923,-5.623 -2.3,-5 -1.05,-5 VD2.2 -0.65,-4.85 -0.5,-5 -0.5,-5.374 -0.324,-5.55 -0.076,-5.55 0.1,-5.374 0.1,-5.148 0.612,-4.636 4.638,-4.636 4.85,-4.424 4.85,-4.176 4.674,-4 3.95,-4 D3.2 3.95,-2 4.647,-2 4.823,-1.824 4.823,-1.346 7.223,1.054 14.824,1.054 15.596,1.826 15.596,5.829 14.933,6.493 13.017,6.493 12.66,6.85 11.05,6.85 10.75,6.55 FU3.1
SSI_SCK: U1.21 U1.25 U3.1 | length 14.7
  Top Layer w0.2: U1.25 -3.5,3.091 -3.383,3.208 -2.289,3.208 -0.55,1.469 -0.55,-0.15 ; U1.21 -2.037,0.7 -1.187,-0.15 -0.55,-0.15 ; U3.1@2.9,-4.225 2,-4.225 0.725,-2.95 0.725,-1.425 -0.55,-0.15
UART1_TX: U1.22 U3.4 | length 13.1
  Top Layer w0.2: U1.22 v1(-1.25,1.1) ; v1(0.725,-7) 1.55,-6.175 U3.4@2.9,-6.175
  Signal Layer 1 w0.3: v1(-1.25,1.1) -1.25,-5.025 v1(0.725,-7)
UART_IN: U1.28 XS5.2 | length 22.6
  Top Layer w0.2: U1.28 -4.7,2.891 -4.466,3.125 -4.146,3.125 -3.5,3.771 v1(-3.5,4.55)
  Bottom Layer w0.2: v1(-3.5,4.55) -3.45,4.5 10.293,4.5 11.835,6.043 14.629,6.043 14.746,5.926 XS5.2
UART_OUT: U1.29 XS5.1 | length 22.2
  Top Layer w0.2: U1.29 -5.1,3.196 v1(-4.396,3.9)
  Bottom Layer w0.2: v1(-4.396,3.9) 9.7,3.9 10.8,2.8 14.629,2.8 14.746,2.917 XS5.1
pads on no net: U1.1 U1.6 U1.7 U1.8 U1.9 U1.10 U1.12 U1.13 U1.18 U1.19 U1.20 U1.26 U1.27 U1.32 U2. U2.4 U4.1 XS1.1 XS1.5 XS2.3 XS2.4 XS3.3 XS3.4 XS5.3 XS5.4 XS5.5 XS5.6 XS6.5

## Polygon pours and split planes (outlines as drawn)
GND on Signal Layer 1 "NONET_L02_P-001" (solid, pour order 10): -17,11 17,11 17,-11 -17,-11
no net on Signal Layer 1 "NONET_L02_P-001" (solid, pour order 9): -17,11
no net on Signal Layer 1 "NONET_L02_P-001" (solid, pour order 3): -13,1
GND on Signal Layer 2 "NONET_L02_P-001" (solid, pour order 6): -17,11 17,11 17,-11 -17,-11
GND on Bottom Layer "NONET_L02_P-001" (solid, pour order 8): -17,11 17,11 17,-11 -17,-11
GND on Top Layer "NONET_L02_P-001" (solid, pour order 7): -17,11 17,11 17,-11 -17,-11

## Silkscreen, mask and mechanical layers (free items; w line width, h text height)
Bottom Overlay:
  lines w0.1: -9.8,0 9.775,0 ; -9.8,0.8 9.775,0.8
Mechanical 1:
  circle w0.3: c3.2,-4.2 r0.1
  circle w0.3: c-6.7,2.3 r0.1
  circle w0.3: c13.8,-5.3 r0.1
  circle w0.3: c-6.7,3.8 r0.1
  lines w0.15: 3.75,6 7.75,6 ; 5.3,-9.7 5.3,-8.7 ; -16.363,2.758 -16.363,6.058 -12.463,6.058 -12.463,2.758 -16.363,2.758 ; -15.4,6 -11.2,6 -11.2,12.5 -15.4,12.5 -15.4,6 ; -14.9,-0.2 -13.9,-0.2 -13.9,2.2 -14.9,2.2 -14.9,-0.2 ; -13.7,1.3 -11.3,1.3 -11.3,2.3 -13.7,2.3 -13.7,1.3 ; -13.5,-4.1 -12.5,-4.1 -12.5,-1.7 -13.5,-1.7 -13.5,-4.1 ; -12.863,-10.642 -12.863,-7.342 -8.963,-7.342 -8.963,-10.642 -12.863,-10.642 ; -12.3,-2.8 -9.9,-2.8 -9.9,-1.8 -12.3,-1.8 -12.3,-2.8 ; -12.3,-1.5 -12.3,-0.5 -9.9,-0.5 -9.9,-1.5 -12.3,-1.5 ; -11,2 -10,2 -10,4.4 -11,4.4 -11,2 ; -10.3,7.4 -6.4,7.4 -6.4,10.7 -10.3,10.7 -10.3,7.4 ; -9.8,1.4 -8.8,1.4 -8.8,3.8 -9.8,3.8 -9.8,1.4 ; -9.7,5.2 -9.7,6.2 -7.3,6.2 -7.3,5.2 -9.7,5.2 ; -8.6,-3.4 -6.2,-3.4 -6.2,-2.4 -8.6,-2.4 -8.6,-3.4 ; -8.6,1.4 -7.6,1.4 -7.6,3.8 -8.6,3.8 -8.6,1.4 ; -7.1,-1.7 -2.7,-1.7 -2.7,2.7 -7.1,2.7 -7.1,-1.7 ; -7.1,3.4 -5.2,3.4 -5.2,5 -7.1,5 -7.1,3.4 ; -6.9,5.2 -4.5,5.2 -4.5,6.2 -6.9,6.2 -6.9,5.2 ; 2.8,-6.6 6.7,-6.6 6.7,-3.8 2.8,-3.8 2.8,-6.6 ; 3.5,-3.3 5.9,-3.3 5.9,-2.3 3.5,-2.3 3.5,-3.3 ; 3.6,-9.7 5.8,-9.7 5.8,-8.7 3.6,-8.7 3.6,-9.7 ; 3.75,2 3.75,7 7.75,7 7.75,2 3.75,2 ; 6.7,-1 10.1,-1 10.1,1.3 6.7,1.3 6.7,-1 ; 7.1,7.5 8.5,7.5 8.5,10.3 7.1,10.3 7.1,7.5 ; 7.2,-3 9.6,-3 9.6,-2 7.2,-2 7.2,-3 ; 7.537,-10.642 7.537,-7.342 11.437,-7.342 11.437,-10.642 7.537,-10.642 ; 8.737,7.458 8.737,10.758 12.637,10.758 12.637,7.458 8.737,7.458 ; 8.8,5.8 11.6,5.8 11.6,7.1 8.8,7.1 8.8,5.8 ; 9.4,-6.1 9.4,-3.7 10.4,-3.7 10.4,-6.1 9.4,-6.1 ; 10.9,-5.8 14.3,-5.8 14.3,-3 10.9,-3 10.9,-5.8 ; 11.537,2.758 11.537,6.058 15.437,6.058 15.437,2.758 11.537,2.758 ; 14.8,-6.4 14.8,-4 15.8,-4 15.8,-6.4 14.8,-6.4
  text "плп-cd_2a" at -3.205,9.501 h1.5
  text "XS3" at 10.137,8.858 h0.5
  text "CN1" at -14,8.8 h0.5
  text "XS4" at -8.9,8.8 h0.5
  text "0.1uF" at -6.7,6.6 h0.5
  text "XS6" at -14.963,4.158 h0.5
  text "XS5" at 12.937,4.158 h0.5
  text "4.7uF" at -11.3,2.7 h0.5 r90
  text "10K" at -15.35,0.35 h0.5 r90
  text "1K" at -12.9,0.35 h0.5
  text "100" at -11.65,-0.15 h0.5
  text "0.1uF" at -7.814,-1.032 h0.5 r90
  text "4.7uF" at -9,-1.1 h0.5 r90
  text "120" at 7.85,-1.65 h0.5
  text "0.1uF" at 3.8,-1.9 h0.5
  text "1K" at -13.85,-3.15 h0.5 r90
  text "100" at -11.65,-3.65 h0.5
  text "10K" at -7.9,-4.15 h0.5
  text "1uF" at 9.35,-6.9 h0.5
  text "1uF" at 14.85,-7.15 h0.5
  text "XS2" at -11.463,-9.242 h0.5
  text "XS1" at 8.937,-9.242 h0.5
  text "D" at -1.2,-10.7 h1.5
Mechanical 2:
  circle w0.3: c-7.9,-6.8 r0.1
  lines w0.15: 3.6,-5.05 3.6,-1.05 ; -8.322,-7.239 -4.422,-7.239 -4.422,-4.439 -8.322,-4.439 -8.322,-7.239 ; -7.25,-8.75 -4.85,-8.75 -4.85,-7.75 -7.25,-7.75 -7.25,-8.75 ; -3.05,-7.05 -2.05,-7.05 -2.05,-4.65 -3.05,-4.65 -3.05,-7.05 ; -0.3,-7.1 -0.3,-4.3 1,-4.3 1,-7.1 -0.3,-7.1 ; 2.6,-5.05 2.6,-1.05 7.6,-1.05 7.6,-5.05 2.6,-5.05 ; 8.4,5.8 11.4,5.8 11.4,7.2 8.4,7.2 8.4,5.8 ; 13.053,7.381 14.453,7.381 14.453,10.381 13.053,10.381 13.053,7.381
  text "120" at -2,-7.9 h0.5
  text "0.1uF" at -5.1,-9.6 h0.5
Mechanical 4:
  lines w0.1: -17,-11 -11,-11 11,-11 17,-11 17,-9 17,9 17,11 11,11 -11,11 -17,11 -17,9 -17,-9 -17,-11